# Altium PCB PCB1.PcbDoc (part 2 of 2)
Units mm, origin at the board's own origin, x right, y up, seen from the top; angles counter-clockwise.
Board outline 223.25 x 140.7 mm, 2 copper layers (Top Layer, Bottom Layer); 96 components, 172 nets, 687 pads, 133 vias.
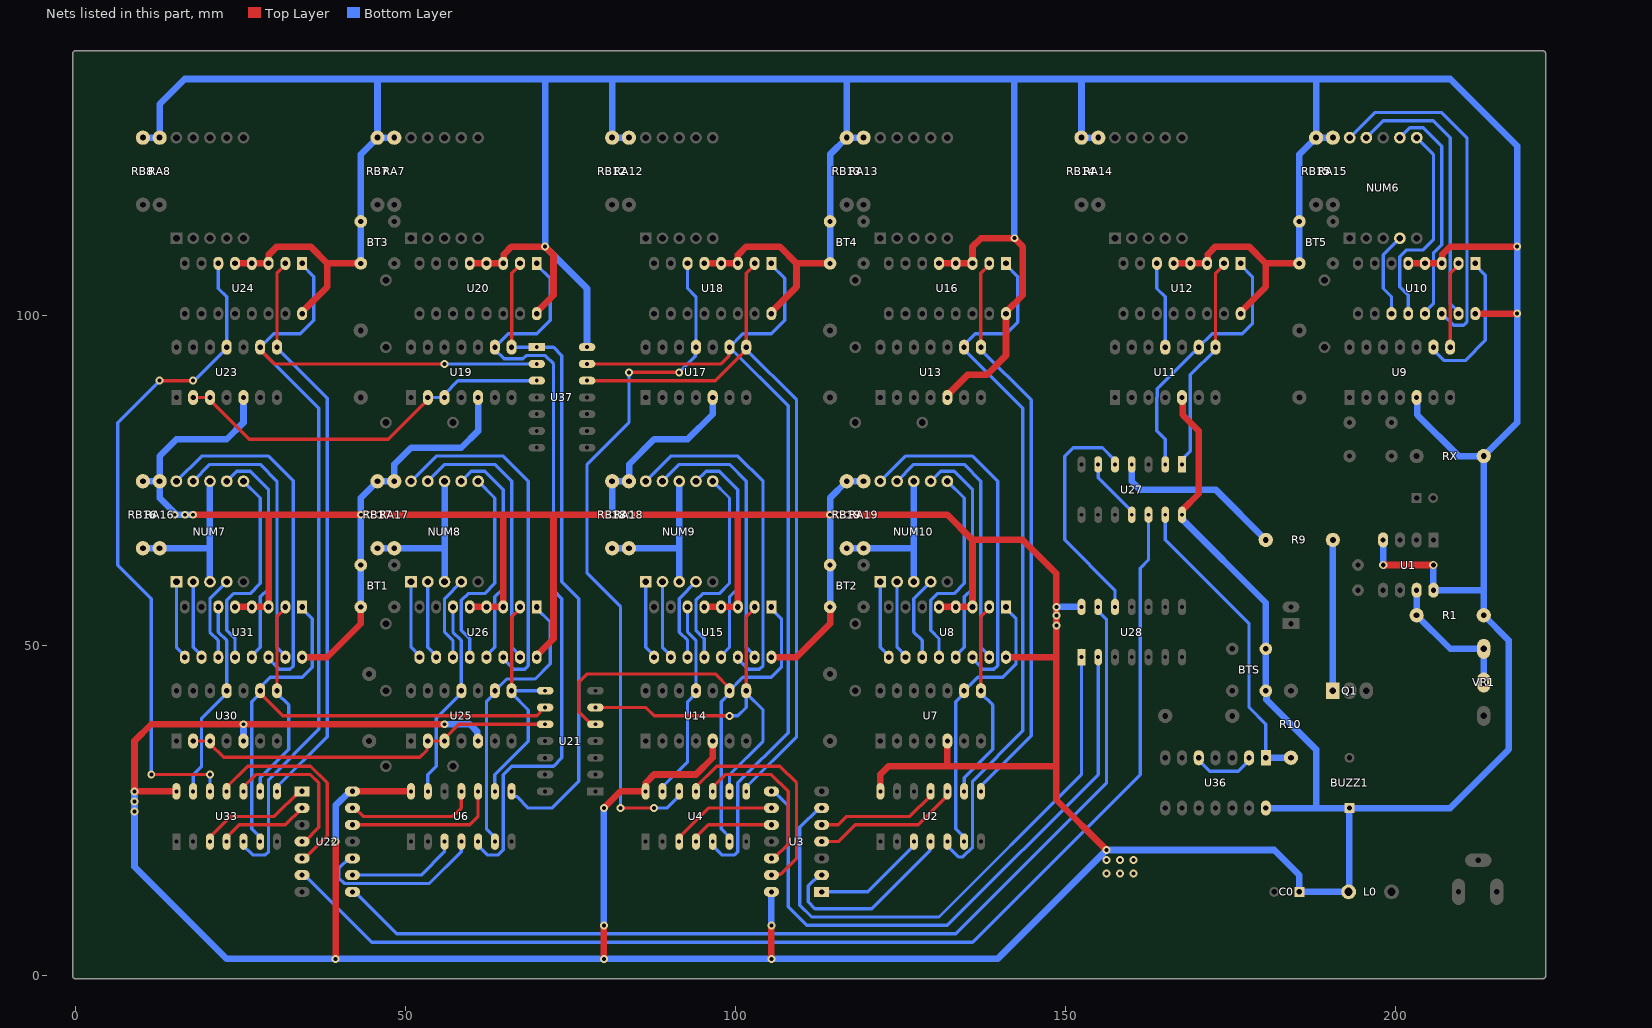
[diagram p2: the nets of this part, all layers, seen from the top]

## Via types
v1: diameter 1.2, hole 0.6, Top Layer to Bottom Layer, tented both sides, 127 vias
v2: diameter 5, hole 3.5, Top Layer to Bottom Layer, 4 vias
v3: diameter 1.27, hole 0.711, Top Layer to Bottom Layer, tented both sides, 2 vias

## Nets (pads, with @x,y where several pads share a name; then routed paths per layer and width w, separated by ;. In a path a pad name is that pad's centre, name@x,y a point inside that pad or via, vN(x,y) a via of type N, cw(c..) or ccw(c..) an arc to the next point about the centre after c; other vN are vias at no path point) (continued)
NetNUM6_4: NUM6.4 U10.11 | length 13
  Bottom Layer w0.5: U10.11@199.39,100.33 199.39,102.87 198.12,104.14 198.12,109.22 NUM6.4@200.66,111.76
NetNUM6_6: NUM6.6 U10.12 | length 31.8
  Bottom Layer w0.5: U10.12@201.93,100.33 201.93,103.124 200.66,104.394 200.66,108.966 201.676,109.982 204.216,109.982 205.74,111.506 205.74,124.46 NUM6.6@203.2,127
NetNUM6_7: NUM6.7 U10.13 | length 34.6
  Bottom Layer w0.5: NUM6.7@200.66,127 202.184,128.524 204.216,128.524 207.01,125.73 207.01,110.744 205.74,109.474 205.74,101.85 204.47,100.58 U10.13@204.47,100.33
NetNUM6_9: NUM6.9 U10.15 | length 42
  Bottom Layer w0.5: NUM6.9@195.58,127 198.12,129.54 205.74,129.54 208.28,127 208.28,101.85 209.55,100.58 U10.15@209.55,100.33
NetNUM6_10: NUM6.10 U10.14 | length 53.6
  Bottom Layer w0.5: NUM6.10@193.04,127 196.85,130.81 207.01,130.81 210.82,127 210.82,99.06 210.312,98.552 208.788,98.552 U10.14@207.01,100.33
NetNUM7_1: NUM7.1 U31.9 | length 12
  Bottom Layer w0.5: NUM7.1@15.24,59.69 15.24,49.78 16.51,48.51 U31.9@16.51,48.26
NetNUM7_2: NUM7.2 U31.10 | length 12
  Bottom Layer w0.5: NUM7.2@17.78,59.69 17.78,49.78 19.05,48.51 U31.10@19.05,48.26
NetNUM7_3: NUM7.3 NUM7.8 RA16.2 RB16.2 | length 25.4
  Bottom Layer w1: RB16.2@10.16,64.77 RA16.2@12.7,64.77 20.32,64.77 ; NUM7.3@20.32,59.69 20.32,64.77 ; NUM7.8@20.32,74.93 20.32,64.77
NetNUM7_4: NUM7.4 U31.11 | length 13
  Bottom Layer w0.5: U31.11@21.59,48.26 21.59,50.8 20.32,52.07 20.32,57.15 NUM7.4@22.86,59.69
NetNUM7_6: NUM7.6 U31.12 | length 31.8
  Bottom Layer w0.5: U31.12@24.13,48.26 24.13,51.054 22.86,52.324 22.86,56.896 23.876,57.912 26.416,57.912 27.94,59.436 27.94,72.39 NUM7.6@25.4,74.93
NetNUM7_7: NUM7.7 U31.13 | length 34.6
  Bottom Layer w0.5: NUM7.7@22.86,74.93 24.384,76.454 26.416,76.454 29.21,73.66 29.21,58.674 27.94,57.404 27.94,49.78 26.67,48.51 U31.13@26.67,48.26
NetNUM7_9: NUM7.9 U31.15 | length 42
  Bottom Layer w0.5: NUM7.9@17.78,74.93 20.32,77.47 27.94,77.47 30.48,74.93 30.48,49.78 31.75,48.51 U31.15@31.75,48.26
NetNUM7_10: NUM7.10 U31.14 | length 53.8
  Bottom Layer w0.5: NUM7.10@15.24,74.93 19.05,78.74 29.21,78.74 32.95,75 32.95,46.92 32.45,46.42 30.8,46.42 29.21,48.01 U31.14@29.21,48.26
NetNUM8_1: NUM8.1 U26.9 | length 12
  Bottom Layer w0.5: NUM8.1@50.8,59.69 50.8,49.78 52.07,48.51 U26.9@52.07,48.26
NetNUM8_2: NUM8.2 U26.10 | length 12
  Bottom Layer w0.5: NUM8.2@53.34,59.69 53.34,49.78 54.61,48.51 U26.10@54.61,48.26
NetNUM8_3: NUM8.3 NUM8.8 RA17.2 RB17.2 | length 25.4
  Bottom Layer w1: RB17.2@45.72,64.77 RA17.2@48.26,64.77 55.88,64.77 ; NUM8.3@55.88,59.69 55.88,64.77 ; NUM8.8@55.88,74.93 55.88,64.77
NetNUM8_4: NUM8.4 U26.11 | length 13
  Bottom Layer w0.5: U26.11@57.15,48.26 57.15,50.8 55.88,52.07 55.88,57.15 NUM8.4@58.42,59.69
NetNUM8_6: NUM8.6 U26.12 | length 31.8
  Bottom Layer w0.5: U26.12@59.69,48.26 59.69,51.054 58.42,52.324 58.42,56.896 59.436,57.912 61.976,57.912 63.5,59.436 63.5,72.39 NUM8.6@60.96,74.93
NetNUM8_7: NUM8.7 U26.13 | length 34.6
  Bottom Layer w0.5: NUM8.7@58.42,74.93 59.944,76.454 61.976,76.454 64.77,73.66 64.77,58.674 63.5,57.404 63.5,49.78 62.23,48.51 U26.13@62.23,48.26
NetNUM8_9: NUM8.9 U26.15 | length 42
  Bottom Layer w0.5: NUM8.9@53.34,74.93 55.88,77.47 63.5,77.47 66.04,74.93 66.04,49.78 67.31,48.51 U26.15@67.31,48.26
NetNUM8_10: NUM8.10 U26.14 | length 53.8
  Bottom Layer w0.5: NUM8.10@50.8,74.93 54.61,78.74 64.77,78.74 68.58,74.93 68.58,46.99 68.01,46.42 66.36,46.42 64.77,48.01 U26.14@64.77,48.26
NetNUM9_1: NUM9.1 U15.9 | length 12
  Bottom Layer w0.5: NUM9.1@86.36,59.69 86.36,49.78 87.63,48.51 U15.9@87.63,48.26
NetNUM9_2: NUM9.2 U15.10 | length 12
  Bottom Layer w0.5: NUM9.2@88.9,59.69 88.9,49.78 90.17,48.51 U15.10@90.17,48.26
NetNUM9_3: NUM9.3 NUM9.8 RA18.2 RB18.2 | length 25.4
  Bottom Layer w1: RB18.2@81.28,64.77 RA18.2@83.82,64.77 91.44,64.77 ; NUM9.3@91.44,59.69 91.44,64.77 ; NUM9.8@91.44,74.93 91.44,64.77
NetNUM9_4: NUM9.4 U15.11 | length 13
  Bottom Layer w0.5: U15.11@92.71,48.26 92.71,50.8 91.44,52.07 91.44,57.15 NUM9.4@93.98,59.69
NetNUM9_6: NUM9.6 U15.12 | length 31.8
  Bottom Layer w0.5: U15.12@95.25,48.26 95.25,51.054 93.98,52.324 93.98,56.896 94.996,57.912 97.536,57.912 99.06,59.436 99.06,72.39 NUM9.6@96.52,74.93
NetNUM9_7: NUM9.7 U15.13 | length 34.6
  Bottom Layer w0.5: NUM9.7@93.98,74.93 95.504,76.454 97.536,76.454 100.33,73.66 100.33,58.674 99.06,57.404 99.06,49.78 97.79,48.51 U15.13@97.79,48.26
NetNUM9_9: NUM9.9 U15.15 | length 42
  Bottom Layer w0.5: NUM9.9@88.9,74.93 91.44,77.47 99.06,77.47 101.6,74.93 101.6,49.78 102.87,48.51 U15.15@102.87,48.26
NetNUM9_10: NUM9.10 U15.14 | length 53.8
  Bottom Layer w0.5: NUM9.10@86.36,74.93 90.17,78.74 100.33,78.74 104.14,74.93 104.14,46.99 103.57,46.42 101.92,46.42 100.33,48.01 U15.14@100.33,48.26
NetNUM10_1: NUM10.1 U8.9 | length 12
  Bottom Layer w0.5: NUM10.1@121.92,59.69 121.92,49.78 123.19,48.51 U8.9@123.19,48.26
NetNUM10_2: NUM10.2 U8.10 | length 12
  Bottom Layer w0.5: NUM10.2@124.46,59.69 124.46,49.78 125.73,48.51 U8.10@125.73,48.26
NetNUM10_3: NUM10.3 NUM10.8 RA19.2 RB19.2 | length 25.4
  Bottom Layer w1: RB19.2@116.84,64.77 RA19.2@119.38,64.77 127,64.77 ; NUM10.3@127,59.69 127,64.77 ; NUM10.8@127,74.93 127,64.77
NetNUM10_4: NUM10.4 U8.11 | length 13
  Bottom Layer w0.5: U8.11@128.27,48.26 128.27,50.8 127,52.07 127,57.15 NUM10.4@129.54,59.69
NetNUM10_6: NUM10.6 U8.12 | length 31.8
  Bottom Layer w0.5: U8.12@130.81,48.26 130.81,51.054 129.54,52.324 129.54,56.896 130.556,57.912 133.096,57.912 134.62,59.436 134.62,72.39 NUM10.6@132.08,74.93
NetNUM10_7: NUM10.7 U8.13 | length 34.6
  Bottom Layer w0.5: NUM10.7@129.54,74.93 131.064,76.454 133.096,76.454 135.89,73.66 135.89,58.674 134.62,57.404 134.62,49.78 133.35,48.51 U8.13@133.35,48.26
NetNUM10_9: NUM10.9 U8.15 | length 42
  Bottom Layer w0.5: NUM10.9@124.46,74.93 127,77.47 134.62,77.47 137.16,74.93 137.16,49.78 138.43,48.51 U8.15@138.43,48.26
NetNUM10_10: NUM10.10 U8.14 | length 53.8
  Bottom Layer w0.5: NUM10.10@121.92,74.93 125.73,78.74 135.89,78.74 139.7,74.93 139.7,46.99 139.13,46.42 137.48,46.42 135.89,48.01 U8.14@135.89,48.26
NetQ1_1: Q1.1 R9.1 | length 22.9
  Bottom Layer w1: Q1.1@190.5,43.18 R9.1@190.5,66.04
NetR1_2: R1.2 U1.7 VR1.2 VR1.3 | length 21.2
  Bottom Layer w1: U1.7@203.2,58.42 R1.2@203.2,54.61 208.28,49.53 VR1.3@213.36,49.53 VR1.2@213.36,44.425
NetR9_2: R9.2 U27.4 | length 26.5
  Bottom Layer w1: U27.4@160.02,77.47 160.02,74.93 161.29,73.66 172.72,73.66 R9.2@180.34,66.04
NetR10_2: R10.2 U27.13 U36.1 | length 47
  Bottom Layer w0.5: U27.13@165.1,69.85 165.1,66.04 177.8,53.34 177.8,40.64 180.34,38.1 U36.1@180.34,33.02
  Bottom Layer w1: U36.1@180.34,33.02 R10.2@184.15,33.02
NetU2_3: U2.3 U3.1 | length 17.5
  Bottom Layer w0.5: U3.1@113.03,12.7 120.03,12.7 127,19.67 U2.3@127,20.32
NetU2_4: U2.4 U3.2 | length 29
  Bottom Layer w0.5: U3.2@113.03,15.24 112.649,15.24 110.998,13.589 110.998,11.176 112.014,10.16 120.65,10.16 129.406,18.916 129.406,20.186 U2.4@129.54,20.32
NetU2_10: U2.10 U3.4 | length 22.6
  Top Layer w0.5: U3.4@113.03,20.32 115.57,20.32 118.11,22.86 127.65,22.86 132.08,27.29 U2.10@132.08,27.94
NetU2_11: U2.11 U3.5 | length 19
  Top Layer w0.5: U3.5@113.03,22.86 115.57,22.86 116.84,24.13 126.38,24.13 129.54,27.29 U2.11@129.54,27.94
NetU3_9: U3.9 U4.3 | length 16.5
  Top Layer w0.5: U4.3@91.44,20.32 91.44,20.97 95.87,25.4 U3.9@105.41,25.4
NetU3_10: U3.10 U4.4 | length 12.9
  Top Layer w0.5: U4.4@93.98,20.32 93.98,20.97 95.87,22.86 U3.10@105.41,22.86
NetU3_12: U3.12 U4.10 | length 25.4
  Top Layer w0.5: U4.10@96.52,27.94 96.52,28.59 98.41,30.48 105.41,30.48 107.95,27.94 107.95,19.939 105.791,17.78 U3.12@105.41,17.78
NetU3_13: U3.13 U4.11 | length 34.5
  Top Layer w0.5: U4.11@93.98,27.94 93.98,28.59 97.14,31.75 106.68,31.75 109.22,29.21 109.22,17.78 106.805,15.365 105.535,15.365 U3.13@105.41,15.24
NetU6_3: U6.3 U22.9 | length 17
  Bottom Layer w0.5: U22.9@41.91,15.24 52.324,15.24 55.862,18.778 55.862,20.302 U6.3@55.88,20.32
NetU6_4: U6.4 U22.10 | length 26.6
  Bottom Layer w0.5: U22.10@41.91,17.78 41.402,17.78 39.878,16.256 39.878,14.732 40.64,13.97 53.594,13.97 58.402,18.778 58.402,20.302 U6.4@58.42,20.32
NetU6_10: U6.10 U22.12 | length 23.4
  Top Layer w0.5: U22.12@41.91,22.86 59.69,22.86 60.96,24.13 U6.10@60.96,27.94
NetU6_11: U6.11 U22.13 | length 20.1
  Top Layer w0.5: U22.13@41.91,25.4 42.291,25.4 43.561,24.13 57.15,24.13 58.42,25.4 U6.11@58.42,27.94
NetU9_8: U9.8 U10.2 | length 13.2
  Top Layer w0.5: U9.8@208.28,95.25 208.28,106.43 209.55,107.7 U10.2@209.55,107.95
NetU9_9: U9.9 U10.1 | length 22.5
  Bottom Layer w0.5: U9.9@205.74,95.25 205.74,94.869 207.391,93.218 210.566,93.218 213.614,96.266 213.614,106.176 212.09,107.7 U10.1@212.09,107.95
NetU11_8: U11.8 U12.2 U27.1 | length 33.1
  Top Layer w0.5: U11.8@172.72,95.25 172.72,106.43 173.99,107.7 U12.2@173.99,107.95
  Bottom Layer w0.5: U27.1@167.64,77.47 167.99,77.82 167.99,78.582 168.91,79.502 168.91,91.059 172.72,94.869 U11.8@172.72,95.25
NetU11_9: U11.9 U12.1 U27.2 | length 40.5
  Bottom Layer w0.5: U27.2@165.1,77.47 165.1,81.28 163.83,82.55 163.83,87.63 163.888,87.688 163.888,88.958 169.42,94.49 169.524,94.49 170.055,95.021 170.055,95.125 172.212,97.282 176.784,97.282 178.308,98.806 178.308,105.922 176.53,107.7 U12.1@176.53,107.95
NetU11_11: U11.11 U12.6 | length 13.2
  Bottom Layer w0.5: U12.6@163.83,107.95 163.83,104.14 165.1,102.87 U11.11@165.1,95.25
NetU19_2: U19.2 U19.3 U23.2 U23.3 U37.3 | length 61.7
  Top Layer w0.5: U23.2@17.78,87.63 U23.3@20.32,87.63 20.32,87.249 26.289,81.28 47.371,81.28 53.34,87.249 U19.2@53.34,87.63
  Bottom Layer w0.5: U23.2@17.78,87.63 U23.3@20.32,87.63 ; U19.2@53.34,87.63 U19.3@55.88,87.63 55.88,88.138 57.912,90.17 U37.3@69.85,90.17
NetU21_10: U21.10 U25.2 U25.3 U30.2 U30.3 | length 57.6
  Top Layer w0.5: U30.2@17.78,35.56 U30.3@20.32,35.56 20.32,35.179 22.41,33.089 52.139,33.089 53.215,34.165 53.215,35.435 U25.2@53.34,35.56 U25.3@55.88,35.56 55.88,35.941 58.039,38.1 U21.10@71.12,38.1
NetU22_1: U22.1 U33.3 | length 17.5
  Top Layer w0.5: U33.3@20.32,20.32 20.32,20.97 23.48,24.13 30.099,24.13 33.909,27.94 U22.1@34.29,27.94
NetU22_2: U22.2 U33.4 | length 13.9
  Top Layer w0.5: U33.4@22.86,20.32 22.86,20.97 24.75,22.86 31.75,22.86 U22.2@34.29,25.4
NetU22_4: U22.4 U33.10 | length 23.6
  Top Layer w0.5: U33.10@25.4,27.94 25.4,28.59 27.29,30.48 35.56,30.48 36.83,29.21 36.83,22.479 34.671,20.32 U22.4@34.29,20.32
NetU22_5: U22.5 U33.11 | length 31.5
  Top Layer w0.5: U33.11@22.86,27.94 22.86,28.59 26.02,31.75 35.56,31.75 38.1,29.21 38.1,21.209 34.671,17.78 U22.5@34.29,17.78
NetU27_5: U27.5 U28.12 | length 35.6
  Bottom Layer w0.5: U28.12@157.48,55.88 157.48,58.42 149.86,66.04 149.86,78.74 151.13,80.01 155.59,80.01 157.48,78.12 U27.5@157.48,77.47
NetU27_6: U27.6 U27.11 | length 9.7
  Bottom Layer w0.5: U27.6@154.94,77.47 154.94,75.47 160.02,70.39 U27.11@160.02,69.85
NetU36_2: U36.2 U36.5 | length 9.7
  Bottom Layer w0.5: U36.5@170.18,33.02 170.18,32.639 171.831,30.988 176.149,30.988 177.8,32.639 U36.2@177.8,33.02
Q1: U2.5 U13.9 U16.1 | length 108
  Bottom Layer w0.5: U2.5@132.08,20.32 132.08,19.67 133.763,17.987 134.422,17.987 135.89,19.455 135.89,29.464 143.51,37.084 143.51,85.979 134.62,94.869 U13.9@134.62,95.25 134.62,95.631 136.271,97.282 140.97,97.282 142.748,99.06 142.748,105.922 140.97,107.7 U16.1@140.97,107.95
Q1A: U2.6 U7.9 U8.1 | length 42.7
  Bottom Layer w0.5: U2.6@134.62,20.32 134.62,20.97 133.35,22.24 133.35,41.529 134.62,42.799 U7.9@134.62,43.18 136.652,45.212 140.462,45.212 142.494,47.244 142.494,54.106 140.97,55.63 U8.1@140.97,55.88
Q2: U2.8 U13.8 U16.2 | length 86.8
  Top Layer w0.5: U13.8@137.16,95.25 137.16,106.43 138.43,107.7 U16.2@138.43,107.95
  Bottom Layer w0.5: U2.8@137.16,27.94 137.16,28.702 144.78,36.322 144.78,87.249 137.16,94.869 U13.8@137.16,95.25
Q2A: U2.9 U7.8 U8.2 | length 31
  Top Layer w0.5: U7.8@137.16,43.18 137.16,54.36 138.43,55.63 U8.2@138.43,55.88
  Bottom Layer w0.5: U2.9@134.62,27.94 134.62,29.972 138.938,34.29 138.938,41.021 137.16,42.799 U7.8@137.16,43.18
Q11: U4.5 U17.9 U18.1 U37.13 | length 131.5
  Top Layer w0.5: U37.13@77.47,92.71 97.79,92.71 98.935,93.855 98.935,95.125 U17.9@99.06,95.25
  Bottom Layer w0.5: U4.5@96.52,20.32 96.52,19.67 97.902,18.288 99.822,18.288 100.33,18.796 100.33,29.21 107.95,36.83 107.95,86.36 U17.9@99.06,95.25 101.092,97.282 105.41,97.282 107.442,99.314 107.442,105.668 105.41,107.7 U18.1@105.41,107.95
Q11A: U4.6 U14.9 U15.1 U21.5 | length 75.5
  Top Layer w0.5: U21.5@78.74,38.1 78.09,38.1 76.2,39.99 76.2,44.45 77.47,45.72 96.901,45.72 99.06,43.561 U14.9@99.06,43.18
  Bottom Layer w0.5: U4.6@99.06,20.32 99.06,20.97 97.79,22.24 97.79,41.529 99.06,42.799 U14.9@99.06,43.18 101.092,45.212 105.41,45.212 106.934,46.736 106.934,54.106 105.41,55.63 U15.1@105.41,55.88
Q22: U4.8 U17.8 U18.2 U37.12 | length 113.3
  Top Layer w0.5: U37.12@77.47,90.17 96.901,90.17 101.6,94.869 U17.8@101.6,95.25 101.6,106.43 102.87,107.7 U18.2@102.87,107.95
  Bottom Layer w0.5: U4.8@101.6,27.94 101.6,28.59 109.22,36.21 109.22,87.249 101.6,94.869 U17.8@101.6,95.25
Q22A: U4.9 U14.8 U15.2 U21.6 | length 57.9
  Top Layer w0.5: U21.6@78.74,40.64 86.36,40.64 87.63,39.37 v1(99.06,39.37) ; U14.8@101.475,43.055 U14.8@101.6,43.18 101.6,54.36 102.87,55.63 U15.2@102.87,55.88
  Bottom Layer w0.5: U4.9@99.06,27.94 99.06,30.48 104.14,35.56 104.14,40.259 U14.8@101.6,42.799 ; v1(99.06,39.37) 100.33,39.37 101.6,40.64 U14.8@101.6,42.799 ; U14.8@101.6,43.18 U14.8@101.6,42.799
Q33: U4.12 U17.11 U18.6 | length 106.8
  Top Layer w0.5: v1(82.55,25.4) v1(87.63,25.4) ; v1(83.82,91.44) v1(91.44,91.44)
  Bottom Layer w0.5: v1(82.55,25.4) 82.55,55.88 77.47,60.96 77.47,77.47 83.82,83.82 v1(83.82,91.44) ; v1(87.63,25.4) 89.55,25.4 91.44,27.29 U4.12@91.44,27.94 ; v1(91.44,91.44) 93.855,93.855 93.855,95.125 U17.11@93.98,95.25 93.98,102.87 92.71,104.14 U18.6@92.71,107.95
Q33A: U4.13 U14.11 U15.6 | length 30.6
  Bottom Layer w0.5: U4.13@88.9,27.94 88.9,28.59 92.71,32.4 92.71,41.529 93.98,42.799 U14.11@93.98,43.18 93.98,50.8 92.71,52.07 U15.6@92.71,55.88
Q111: U6.5 U19.9 U20.1 | length 117.1
  Bottom Layer w0.5: U6.5@60.96,20.32 60.96,19.67 62.342,18.288 64.008,18.288 64.77,19.05 64.77,30.48 66.04,31.75 72.39,31.75 73.66,33.02 73.66,57.15 72.39,58.42 72.39,92.71 71.12,93.98 68.268,93.98 67.76,93.472 64.897,93.472 63.5,94.869 U19.9@63.5,95.25 65.532,97.282 69.85,97.282 71.882,99.314 71.882,105.668 69.85,107.7 U20.1@69.85,107.95
Q111A: U6.6 U25.9 U26.1 | length 43.5
  Bottom Layer w0.5: U6.6@63.5,20.32 63.5,20.97 62.23,22.24 62.23,41.529 63.5,42.799 U25.9@63.5,43.18 65.278,44.958 69.596,44.958 71.882,47.244 71.882,53.598 69.85,55.63 U26.1@69.85,55.88
Q222: U6.8 U19.8 U20.2 U37.1 | length 100.1
  Top Layer w0.5: U19.8@66.04,95.25 66.04,106.43 67.31,107.7 U20.2@67.31,107.95
  Bottom Layer w0.5: U6.8@66.04,27.94 66.04,27.479 66.363,27.156 66.824,27.156 68.58,25.4 72.13,25.4 76.2,29.47 76.2,57.15 73.66,59.69 73.66,93.98 72.39,95.25 U37.1@69.85,95.25 U19.8@66.04,95.25
Q222A: U6.9 U21.8 U25.8 U26.2 | length 36.7
  Top Layer w0.5: U25.8@66.04,43.18 66.04,54.36 67.31,55.63 U26.2@67.31,55.88
  Bottom Layer w0.5: U6.9@63.5,27.94 63.5,30.48 68.58,35.56 68.58,40.259 66.04,42.799 U25.8@66.04,43.18 U21.8@71.12,43.18
Q333A: U6.13 U25.11 U26.6 | length 30.6
  Bottom Layer w0.5: U6.13@53.34,27.94 53.34,30.48 54.61,31.75 54.61,38.989 58.42,42.799 U25.11@58.42,43.18 58.42,50.8 57.15,52.07 U26.6@57.15,55.88
Q1111: U23.9 U24.1 U33.5 U37.2 | length 150.9
  Top Layer w0.5: U23.9@27.94,95.25 27.94,94.869 30.099,92.71 v1(55.88,92.71)
  Bottom Layer w0.5: U33.5@25.4,20.32 25.4,19.67 26.782,18.288 28.702,18.288 29.21,18.796 29.21,29.718 36.83,37.338 36.83,85.979 27.94,94.869 U23.9@27.94,95.25 29.972,97.282 34.036,97.282 36.068,99.314 36.068,105.922 34.29,107.7 U24.1@34.29,107.95 ; v1(55.88,92.71) U37.2@69.85,92.71
Q1111A: U21.9 U30.9 U31.1 U33.6 | length 89.1
  Top Layer w0.5: U30.9@27.94,43.18 27.94,42.799 31.369,39.37 69.85,39.37 70.34,39.86 70.34,40.317 70.664,40.64 U21.9@71.12,40.64
  Bottom Layer w0.5: U33.6@27.94,20.32 27.94,20.97 26.67,22.24 26.67,41.529 27.94,42.799 27.94,43.688 29.464,45.212 34.29,45.212 35.814,46.736 35.814,54.106 34.29,55.63 U31.1@34.29,55.88
Q2222: U23.8 U24.2 U33.8 | length 86.8
  Top Layer w0.5: U23.8@30.48,95.25 30.48,106.43 31.75,107.7 U24.2@31.75,107.95
  Bottom Layer w0.5: U33.8@30.48,27.94 30.48,28.59 38.1,36.21 38.1,87.526 30.48,95.146 U23.8@30.48,95.25
Q2222A: U30.8 U31.2 U33.9 | length 31.4
  Top Layer w0.5: U30.8@30.48,42.799 U30.8@30.48,43.18 30.48,54.36 31.75,55.63 U31.2@31.75,55.88
  Bottom Layer w0.5: U33.9@27.94,27.94 27.94,29.972 32.258,34.29 32.258,41.021 30.48,42.799 U30.8@30.48,43.18
Q3333: U23.11 U24.6 U33.12 | length 101.5
  Top Layer w0.5: v1(11.43,30.48) v1(20.32,30.48) ; v1(12.7,90.17) v1(17.78,90.17)
  Bottom Layer w0.5: v1(11.43,30.48) 11.43,57.15 6.35,62.23 6.35,83.82 v1(12.7,90.17) ; v1(17.78,90.17) 17.969,90.17 22.86,95.061 22.86,102.87 21.59,104.14 U24.6@21.59,107.95 ; U33.12@20.32,27.94 v1(20.32,30.48)
Q3333A: U30.11 U31.6 U33.13 | length 30.6
  Bottom Layer w0.5: U33.13@17.78,27.94 17.78,30.48 19.05,31.75 19.05,38.989 22.86,42.799 U30.11@22.86,43.18 22.86,50.8 21.59,52.07 U31.6@21.59,55.88
VCC: BT1.1 BT1.4 BT2.1 BT2.4 BT3.1 BT3.4 BT4.1 BT4.4 BT5.1 BT5.4 BTS.1 BTS.4 BUZZ1.1 C0.1 L0.2 R1.1 RA7.1 RA8.1 RA12.1 RA13.1 RA14.1 RA15.1 RA16.1 RA17.1 RA18.1 RA19.1 RB7.1 RB8.1 RB12.1 RB13.1 RB14.1 RB15.1 RB16.1 RB17.1 RB18.1 RB19.1 RX.1 U1.4 U1.8 U2.14 U3.14 U4.14 U6.14 U7.5 U8.3 U8.4 U8.5 U8.16 U9.5 U10.3 U10.4 U10.5 U10.16 U11.5 U12.3 U12.4 U12.5 U12.16 U13.5 U14.5 U15.3 U15.4 U15.5 U15.16 U16.3 U16.4 U16.5 U16.16 U17.5 U18.3 U18.4 U18.5 U18.16 U19.5 U20.3 U20.4 U20.5 U20.16 U22.14 U23.5 U24.3 U24.4 U24.5 U24.16 U25.5 U26.3 U26.4 U26.5 U26.16 U27.14 U28.14 U30.5 U31.3 U31.4 U31.5 U31.16 U33.14 U36.14 U37.14 | length 1703.5
  Top Layer w1: U33.14@15.24,27.94 v1(8.89,27.94) 8.89,35.56 11.43,38.1 v1(25.4,38.1) v1(55.88,38.1) ; v1(17.78,69.85) 29.21,69.85 ; U31.5@24.13,55.88 U31.4@26.67,55.88 U31.3@29.21,55.88 29.21,69.85 ; U24.5@24.13,107.95 U24.4@26.67,107.95 U24.3@29.21,107.95 29.21,109.22 30.48,110.49 35.56,110.49 38.1,107.95 ; U31.16@34.29,48.26 38.1,48.26 43.18,53.34 BT1.1@43.18,55.88 ; U24.16@34.29,100.33 34.29,100.58 38.1,104.39 38.1,107.95 ; v1(39.37,2.54) v1(39.37,20.32) ; U22.14@41.91,27.94 U6.14@50.8,27.94 ; BT3.1@43.18,107.95 38.1,107.95 ; U26.5@59.69,55.88 U26.4@62.23,55.88 U26.3@64.77,55.88 64.77,69.85 ; U20.5@59.69,107.95 U20.4@62.23,107.95 U20.3@64.77,107.95 64.851,108.031 64.851,109.301 66.04,110.49 v1(71.12,110.49) 72.39,109.22 72.39,103.12 69.85,100.58 U20.16@69.85,100.33 ; U26.16@69.85,48.26 69.85,48.51 72.39,51.05 72.39,69.85 ; v1(80.01,2.54) v1(80.01,7.62) ; v1(80.01,25.4) 82.55,27.94 U4.14@86.36,27.94 86.398,27.978 86.398,29.248 87.63,30.48 93.98,30.48 96.52,33.02 U14.5@96.52,35.56 ; U15.5@95.25,55.88 U15.4@97.79,55.88 U15.3@100.33,55.88 100.33,69.85 ; U18.5@95.25,107.95 U18.4@97.79,107.95 U18.3@100.33,107.95 100.33,109.22 101.6,110.49 106.68,110.49 109.22,107.95 ; v1(105.41,2.54) v1(105.41,7.62) ; U15.16@105.41,48.26 109.22,48.26 114.3,53.34 BT2.1@114.3,55.88 ; U18.16@105.41,100.33 105.41,100.58 109.22,104.39 109.22,107.95 ; BT4.1@114.3,107.95 109.22,107.95 ; U2.14@121.92,27.94 121.92,30.48 123.19,31.75 132.08,31.75 ; U8.5@130.81,55.88 U8.4@133.35,55.88 U8.3@135.89,55.88 135.89,66.04 ; U16.5@130.81,107.95 U16.4@133.35,107.95 U16.3@135.89,107.95 135.89,110.49 137.16,111.76 v1(142.24,111.76) 143.51,110.49 143.51,103.12 140.97,100.58 U16.16@140.97,100.33 140.97,93.98 138.036,91.046 135.115,91.046 132.08,88.011 U13.5@132.08,87.63 ; U7.5@132.08,35.56 132.08,31.75 ; U8.16@140.97,48.26 148.59,48.26 ; v1(156.21,19.05) 148.59,26.67 148.59,31.75 ; U12.5@166.37,107.95 U12.4@168.91,107.95 U12.3@171.45,107.95 171.531,108.031 171.531,109.301 172.72,110.49 177.8,110.49 180.34,107.95 ; U27.14@167.64,69.85 167.64,70.5 170.18,73.04 170.18,82.55 167.74,84.99 167.74,87.53 U11.5@167.64,87.63 ; U12.16@176.53,100.33 176.53,100.58 180.34,104.39 180.34,107.95 ; BT5.1@185.42,107.95 180.34,107.95 ; v3(198.12,62.23) v3(205.74,62.23) ; U10.5@201.93,107.95 U10.4@204.47,107.95 U10.3@207.01,107.95 207.091,108.031 207.091,109.301 208.28,110.49 v1(218.44,110.49) ; U10.16@212.09,100.33 v1(218.44,100.33) ; 29.21,69.85 v1(43.18,69.85) 64.77,69.85 ; 64.77,69.85 72.39,69.85 ; 72.39,69.85 v1(81.28,69.85) 100.33,69.85 ; 100.33,69.85 v1(114.3,69.85) 124.46,69.85 132.08,69.85 135.89,66.04 ; 132.08,31.75 148.59,31.75 ; 135.89,66.04 143.51,66.04 148.59,60.96 v1(148.59,55.88) 148.59,48.26 ; 148.59,31.75 148.59,48.26
  Bottom Layer w1: v1(8.89,27.94) v1(8.89,26.416) v1(8.89,24.892) 8.89,16.51 22.86,2.54 v1(39.37,2.54) v1(80.01,2.54) v1(105.41,2.54) 139.7,2.54 v1(156.21,19.05) 181.61,19.05 185.42,15.24 C0.1@185.42,12.7 L0.2@192.89,12.7 192.965,12.775 192.965,25.325 BUZZ1.1@193.04,25.4 ; RB16.1@10.16,74.93 RA16.1@12.7,74.93 ; RB8.1@10.16,127 RA8.1@12.7,127 12.7,132.08 16.51,135.89 45.72,135.89 ; v1(17.78,69.85) 15.24,69.85 12.7,72.39 RA16.1@12.7,74.93 ; U30.5@25.4,35.56 v1(25.4,38.1) ; U23.5@25.4,87.63 25.4,83.82 22.86,81.28 15.24,81.28 12.7,78.74 RA16.1@12.7,74.93 ; v1(39.37,20.32) 39.37,25.781 41.529,27.94 U22.14@41.91,27.94 ; BT1.1@43.18,55.88 BT1.4@43.18,62.23 v1(43.18,69.85) 43.18,72.39 RB17.1@45.72,74.93 RA17.1@48.26,74.93 48.26,77.47 50.8,80.01 58.42,80.01 60.96,82.55 U19.5@60.96,87.63 ; BT3.1@43.18,107.95 BT3.4@43.18,114.3 43.18,124.46 RB7.1@45.72,127 ; RA7.1@48.26,127 RB7.1@45.72,127 ; v1(55.88,38.1) 59.69,38.1 60.86,36.93 60.86,35.66 U25.5@60.96,35.56 ; U37.14@77.47,95.25 77.47,104.14 v1(71.12,110.49) 71.12,135.89 ; v1(80.01,7.62) v1(80.01,25.4) ; v1(81.28,69.85) RB18.1@81.28,74.93 RA18.1@83.82,74.93 83.859,74.969 83.859,77.509 87.63,81.28 92.71,81.28 96.52,85.09 U17.5@96.52,87.63 ; RA12.1@83.82,127 RB12.1@81.28,127 81.28,135.89 ; v1(105.41,7.62) U3.14@105.41,12.7 ; BT2.1@114.3,55.88 BT2.4@114.3,62.23 v1(114.3,69.85) 114.3,72.39 RB19.1@116.84,74.93 RA19.1@119.38,74.93 ; BT4.1@114.3,107.95 BT4.4@114.3,114.3 114.3,124.46 RB13.1@116.84,127 ; RA13.1@119.38,127 RB13.1@116.84,127 ; v1(142.24,111.76) 142.24,135.89 ; v1(148.59,55.88) U28.14@152.4,55.88 ; RA14.1@154.94,127 RB14.1@152.4,127 152.4,135.89 ; U27.14@167.64,69.85 167.64,69.2 180.34,56.5 BTS.1@180.34,49.53 BTS.4@180.34,43.18 180.439,43.081 180.439,41.811 187.96,34.29 187.96,25.4 ; U36.14@180.34,25.4 187.96,25.4 ; BT5.1@185.42,107.95 BT5.4@185.42,114.3 185.42,124.46 RB15.1@187.96,127 ; RA15.1@190.5,127 RB15.1@187.96,127 ; v3(198.12,62.23) U1.4@198.12,66.04 ; U9.5@203.2,87.63 203.3,87.53 203.3,84.99 209.55,78.74 RX.1@213.36,78.74 ; v3(205.74,62.23) U1.8@205.74,58.42 213.36,58.42 ; RB7.1@45.72,127 45.72,135.89 ; 45.72,135.89 71.12,135.89 ; 71.12,135.89 81.28,135.89 ; 81.28,135.89 116.84,135.89 ; RB13.1@116.84,127 116.84,135.89 ; 116.84,135.89 142.24,135.89 ; 142.24,135.89 152.4,135.89 ; 152.4,135.89 187.96,135.89 ; 187.96,25.4 BUZZ1.1@193.04,25.4 ; RB15.1@187.96,127 187.96,135.89 ; 187.96,135.89 208.28,135.89 218.44,125.73 v1(218.44,110.49) v1(218.44,100.33) 218.44,83.82 RX.1@213.36,78.74 ; BUZZ1.1@193.04,25.4 208.28,25.4 217.17,34.29 217.17,50.8 R1.1@213.36,54.61 213.36,58.42 ; 213.36,58.42 RX.1@213.36,78.74
  other v1: 156.21,15.494 158.242,15.494 160.274,15.494 156.21,17.526 158.242,17.526 160.274,17.526 148.59,53.086 148.59,54.61 14.986,69.85 16.51,69.85 44.45,69.85 45.974,69.85 82.55,69.85 84.074,69.85 115.57,69.85 116.84,69.85
Z1: U3.6 U28.1 | length 87.5
  Bottom Layer w0.5: U3.6@113.03,25.4 112.649,25.4 109.728,22.479 109.728,10.668 111.506,8.89 130.81,8.89 152.4,30.48 U28.1@152.4,49.326
Z2: U3.8 U28.2 | length 94.2
  Bottom Layer w0.5: U3.8@105.41,27.94 105.791,27.94 107.95,25.781 107.95,10.414 110.744,7.62 132.08,7.62 154.94,30.48 U28.2@154.94,48.26
Z3: U22.8 U28.13 | length 153.6
  Bottom Layer w0.5: U22.8@41.91,12.7 42.291,12.7 48.641,6.35 133.35,6.35 156.21,29.21 156.21,53.96 154.94,55.23 U28.13@154.94,55.88
Z4: U22.6 U27.12 | length 181.6
  Bottom Layer w0.5: U22.6@34.29,15.24 34.671,15.24 44.831,5.08 135.89,5.08 161.29,30.48 161.29,61.743 162.56,63.013 U27.12@162.56,69.85
pads on no net: NUM1.5 NUM2.5 NUM3.5 NUM4.5 NUM5.5 NUM6.5 NUM7.5 NUM8.5 NUM9.5 NUM10.5 U3.3 U3.11 U7.4 U7.13 U9.4 U9.13 U11.4 U11.13 U13.4 U13.13 U14.4 U14.13 U17.4 U17.13 U19.4 U19.13 U21.1 U21.2 U21.3 U21.7 U21.11 U21.12 U21.13 U21.14 U22.3 U22.11 U23.4 U23.13 U25.4 U25.13 U27.8 U27.9 U27.10 U28.3 U28.4 U28.5 U28.6 U28.8 U28.9 U28.10 U28.11 U30.4 U30.13 U36.8 U36.9 U36.10 U36.11 U36.12 U36.13 U37.4 U37.5 U37.6 U37.8 U37.9 U37.10

## Polygon pours and split planes (outlines as drawn)
GND on Bottom Layer "NONET_L-01_P-001" (solid, remove dead copper, pour order 0): 0,139.7 0,0 222.25,0 222.25,139.7
GND on Top Layer "NONET_L-01_P-001" (solid, pour order 1): 0,0 0,139.7 222.25,139.7 222.25,0

## Keep-outs
Keep-Out Layer:
  lines w1: 0,0 0,139.7 222.25,139.7 222.25,0 0,0

## Other copper
Top Layer:
  region net VCC: 149.86,56.388 149.098,57.15 148.082,57.15 147.32,56.388 147.32,53.086 148.082,52.324 149.098,52.324 149.86,53.086
  region net VCC: 18.288,68.58 19.05,69.342 19.05,70.358 18.288,71.12 14.986,71.12 14.224,70.358 14.224,69.342 14.986,68.58
  region net VCC: 42.672,71.12 41.91,70.358 41.91,69.342 42.672,68.58 45.974,68.58 46.736,69.342 46.736,70.358 45.974,71.12
  region net VCC: 80.772,71.12 80.01,70.358 80.01,69.342 80.772,68.58 84.074,68.58 84.836,69.342 84.836,70.358 84.074,71.12
  region net VCC: 113.792,71.12 113.03,70.358 113.03,69.342 113.792,68.58 117.094,68.58 117.856,69.342 117.856,70.358 117.094,71.12
  region net VCC: 9.652,23.876 10.414,24.638 10.414,28.956 9.144,30.226 8.636,30.226 7.874,29.464 7.874,24.384 8.382,23.876
  region net VCC: 156.21,19.05 153.035,15.875 154.94,13.97 160.02,13.97 162.56,16.51 162.56,19.05
Bottom Layer:
  region net VCC: 149.86,56.388 149.098,57.15 148.082,57.15 147.32,56.388 147.32,53.086 148.082,52.324 149.098,52.324 149.86,53.086
  region net VCC: 18.288,68.58 18.796,69.088 18.796,70.612 18.288,71.12 14.986,71.12 14.224,70.358 14.224,69.342 14.986,68.58
  region net VCC: 42.672,71.12 41.91,70.358 41.91,69.342 42.672,68.58 45.974,68.58 46.736,69.342 46.736,70.358 45.974,71.12
  region net VCC: 80.772,71.12 80.01,70.358 80.01,69.342 80.772,68.58 84.074,68.58 84.836,69.342 84.836,70.358 84.074,71.12
  region net VCC: 113.792,71.12 113.03,70.358 113.03,69.342 113.792,68.58 117.094,68.58 117.856,69.342 117.856,70.358 117.094,71.12
  region net VCC: 9.652,23.368 10.922,24.638 10.922,28.448 9.144,30.226 7.62,30.226 6.858,29.464 6.858,24.638 8.128,23.368 8.636,23.368
  region net VCC: 41.656,2.54 40.64,3.556 38.1,3.556 37.084,2.54 38.1,1.524 40.64,1.524
  region net VCC: 82.296,2.54 81.026,3.81 78.74,3.81 77.47,2.54 78.486,1.524 81.28,1.524 82.042,2.286
  region net VCC: 107.696,2.54 106.68,3.556 104.14,3.556 103.124,2.54 104.14,1.524 106.68,1.524
  region net VCC: 217.932,113.284 216.84,112.192 216.84,98.628 218.44,97.028 219.456,98.044 219.456,112.522 218.694,113.284
  region net VCC: 218.44,84.582 218.948,84.074 218.948,30.988 210.312,22.352 194.818,22.352 194.818,27.178 194.564,27.432 207.264,27.432 215.9,36.068 215.9,50.546 212.09,54.356 212.09,80.772 217.932,86.614 218.44,86.614
  region net Net5V_1: 197.612,10.668 198.628,9.652 210.312,9.652 211.328,10.668 211.328,14.478 210.312,15.494 198.12,15.494 197.612,14.986
  region net VCC: 187.96,28.702 195.072,28.702 195.58,28.194 195.58,11.176 194.056,9.652 185.674,9.652 184.15,11.176 184.15,24.892
  region net VCC: 156.21,19.05 153.035,15.875 154.94,13.97 160.02,13.97 162.56,16.51 162.56,19.05

## Text inside footprints (layer, text, board x,y; h text height)
5V: Top Overlay "3" at 212.09,15.24 h1.52; Top Overlay "2" at 213.36,12.7 h1.52; Top Overlay "1" at 210.82,12.7 h1.52
BUZZ1: Top Overlay "+" at 193.751,26.81 h1.52 r90
C0: Top Overlay "+" at 188.84,13.437 h1.52 r180
C1: Top Overlay "+" at 199.975,71.653 h1.52
U8: Top Overlay "DIP-16" at 136.398,52.832 h1.52 r180
U10: Top Overlay "DIP-16" at 207.518,104.902 h1.52 r180
U12: Top Overlay "DIP-16" at 171.958,104.902 h1.52 r180
U15: Top Overlay "DIP-16" at 100.838,52.832 h1.52 r180
U16: Top Overlay "DIP-16" at 136.398,104.902 h1.52 r180
U18: Top Overlay "DIP-16" at 100.838,104.902 h1.52 r180
U20: Top Overlay "DIP-16" at 65.278,104.902 h1.52 r180
U24: Top Overlay "DIP-16" at 29.718,104.902 h1.52 r180
U26: Top Overlay "DIP-16" at 65.278,52.832 h1.52 r180
U31: Top Overlay "DIP-16" at 29.718,52.832 h1.52 r180